# EAGLE board Duikershelm (EAGLE 9.6.2)

Size 100 x 80 mm. Coordinates in mm from the lower left corner, seen from the top.
Outline: 0,0 100,0 100,80 0,80 0,0
Copper layers (1*16): Top 0.035mm / dielectric 1.5mm / Bottom 0.035mm
Design rules "default": minimum track width 6mil, minimum drill 0.35mm, track to track 6mil, track to pad 6mil, pad to pad 6mil, via to via 6mil, smd to smd 6mil, copper to edge 40mil, drill to drill 6mil, minimum pad ring 10mil, minimum via ring 8mil, stop-mask expansion 4mil, vias tented up to drill 0mil, thermal gap 10mil

## Footprints (pad centres in the part's own frame; a part is rotated, then mirrored left to right if it is on the bottom)
1,6/0,8 = drill 0.813 pad 1.6 octagon: 1 0,0
FOOTPWRLED = smd 1.27 x 2.54: P$1 -1.27,0 | smd 0.508 x 3.175: P$2 -2.667,-0.051; P$3 0.127,-0.051

## Placement (x,y rotation side)
GND  [1,6/0,8]  2.27,53.02 180 top
GND1  [1,6/0,8]  2.33,35.03 0 top
GND2  [1,6/0,8]  2.33,16.95 0 top
OUT1  [1,6/0,8]  2.32,40.97 0 top
OUT2  [1,6/0,8]  2.34,23.05 0 top
U$3  PWRLED  [FOOTPWRLED]  70.04,38.65 270 top
VCC1  [1,6/0,8]  2.28,47 0 top
VCC2  [1,6/0,8]  2.32,29.07 0 top
VIN  [1,6/0,8]  2.28,58.99 0 top

## Library data of the parts
GND GND1 GND2 OUT1 OUT2 VCC1 VCC2 VIN = wirepad
U$3 = PWRLED

## Nets
N$1: OUT1.1 VCC2.1
N$2: VCC1.1 VIN.1
N$5: OUT2.1 U$3.P$1
N$6: GND1.1 GND2.1 GND.1 U$3.P$2

## Tracks (layer width: path | path; a pad name or v marks a point on that pad's centre or on a via)
N$1  (1 unrouted)
N$2  (1 unrouted)
N$5  (1 unrouted)
N$6  (3 unrouted)
(copper drawn outside any net)
  shapes: Top area x8